# EAGLE board MotorDriver (EAGLE 9.7.0)

Size 332.7 x 154.54 mm. Coordinates in mm from the lower left corner, seen from the top.
Outline: 0,0 332.7,0 332.7,154.54 0,154.54 0,0
Copper layers (1*16): Top 0.035mm / dielectric 1.5mm / Bottom 0.035mm
Design rules "default": minimum track width 6mil, minimum drill 0.35mm, track to track 6mil, track to pad 6mil, pad to pad 6mil, via to via 6mil, smd to smd 6mil, copper to edge 40mil, drill to drill 6mil, minimum pad ring 10mil, minimum via ring 8mil, stop-mask expansion 4mil, vias tented up to drill 0mil, thermal gap 10mil

## Footprints (pad centres in the part's own frame; a part is rotated, then mirrored left to right if it is on the bottom)
BATTERY-GENERIC = drill 1.118 pad 3.15 octagon: + 2.54,0; - -2.54,0
BAT_3002 = smd 3.96 x 3.96: N 0,0.65 | smd 5.08 x 5.08: P 12.825,0.65; P1 -12.825,0.65
MOTOR = drill 1.118 pad 3.15 octagon: + 2.54,0; - -2.54,0
TO92 = drill 0.813 octagon: 1 -1.27,0; 2 0,1.905; 3 1.27,0
ARDUINO-UNO-R3-SHIELD = drill 1.016 pad 1.88: 3.3V 24.13,-2.54; 5V 24.13,0; A0 24.13,12.7; A1 24.13,15.24; A2 24.13,17.78; A3 24.13,20.32; A4 24.13,22.86; A5 24.13,25.4; AREF -24.13,-13.97; D2 -24.13,20.32; D3 -24.13,17.78; D4 -24.13,15.24; D5 -24.13,12.7; D6 -24.13,10.16; D7 -24.13,7.62; D8 -24.13,3.81; D9 -24.13,1.27; D10 -24.13,-1.27; D11 -24.13,-3.81; D12 -24.13,-6.35; D13 -24.13,-8.89; GND@0 24.13,2.54; GND@1 24.13,5.08; GND@2 -24.13,-11.43; IOREF 24.13,-7.62; NC 24.13,-10.16; RES 24.13,-5.08; RX -24.13,25.4; SCL -24.13,-19.05; SDA -24.13,-16.51; TX -24.13,22.86; VIN 24.13,7.62

## Placement (x,y rotation side)
BAT1  9V  [BATTERY-GENERIC]  324.45,137.51 270 top
BAT2  BR2016  [BAT_3002]  289.94,138.78 0 top
M1  MOTOR_HDR  [MOTOR]  291.26,84.09 270 top
T1  PMOSFET  [TO92]  134.57,4.83 0 top
T3  PMOSFET  [TO92]  211.13,8.16 0 top
T4  NMOSFET  [TO92]  218.8,44.24 90 top
T5  NMOSFET  [TO92]  159.66,29.71 0 top
U1  ARDUINO-UNO-R3-SHIELD  [ARDUINO-UNO-R3-SHIELD]  47.88,107.79 270 top

## Library data of the parts
BAT1 M1 U1 = Tinkercad
BAT2 = Tinkercad; CATEGORY: Battery-Holder; CELL_DIAMETER: 20mm; DESCRIPTION: Battery Retainer Coin, 20.0mm 1 Cell SMD (SMT) Tab; MANUFACTURER: Keystone Electronics; MPN: 3002; PART_STATUS: ACTIVE; ROHS_COMPLIANT: COMPLIANT; SERIES: -; SUB_CATEGORY: Holder; TYPE: Coin Cell
T1 T3 = Tinkercad; CATEGORY: Transistor; SUB-CATEGORY: MOSFET; TYPE: P-Channel
T4 T5 = Tinkercad; CATEGORY: Transistor; SUB-CATEGORY: MOSFET; TYPE: N-Channel

## Nets
BAT1+: BAT1.+ T1.1 T3.1
BAT1-: BAT1.- BAT2.P BAT2.P1
BAT2-: BAT2.N T4.3 T5.3 U1.GND@0 U1.GND@1 U1.GND@2
M1_+: M1.+ T1.3 T4.1
M1_-: M1.- T3.3 T5.1
U1_A0: T1.2 U1.A0
U1_A1: T3.2 U1.A1
U1_D12: T4.2 U1.D12
U1_D13: T5.2 U1.D13

## Tracks (layer width: path | path; a pad name or v marks a point on that pad's centre or on a via)
BAT1+  (2 unrouted)
BAT1-  (2 unrouted)
BAT2-  (5 unrouted)
M1_+  (2 unrouted)
M1_-  (2 unrouted)
U1_A0  (1 unrouted)
U1_A1  (1 unrouted)
U1_D12  (1 unrouted)
U1_D13  (1 unrouted)